# Altium PCB isokey_left.PcbDoc (part 1 of 5)
Units mm, origin at the board's own origin, x right, y up, seen from the top; angles counter-clockwise.
Board outline 154.06 x 134.15 mm, 2 copper layers (Top Layer, Bottom Layer), stack 1.569 mm thick; 140 components, 88 nets, 412 pads, 257 vias.
Unrouted connection lines stored in the file: 18.
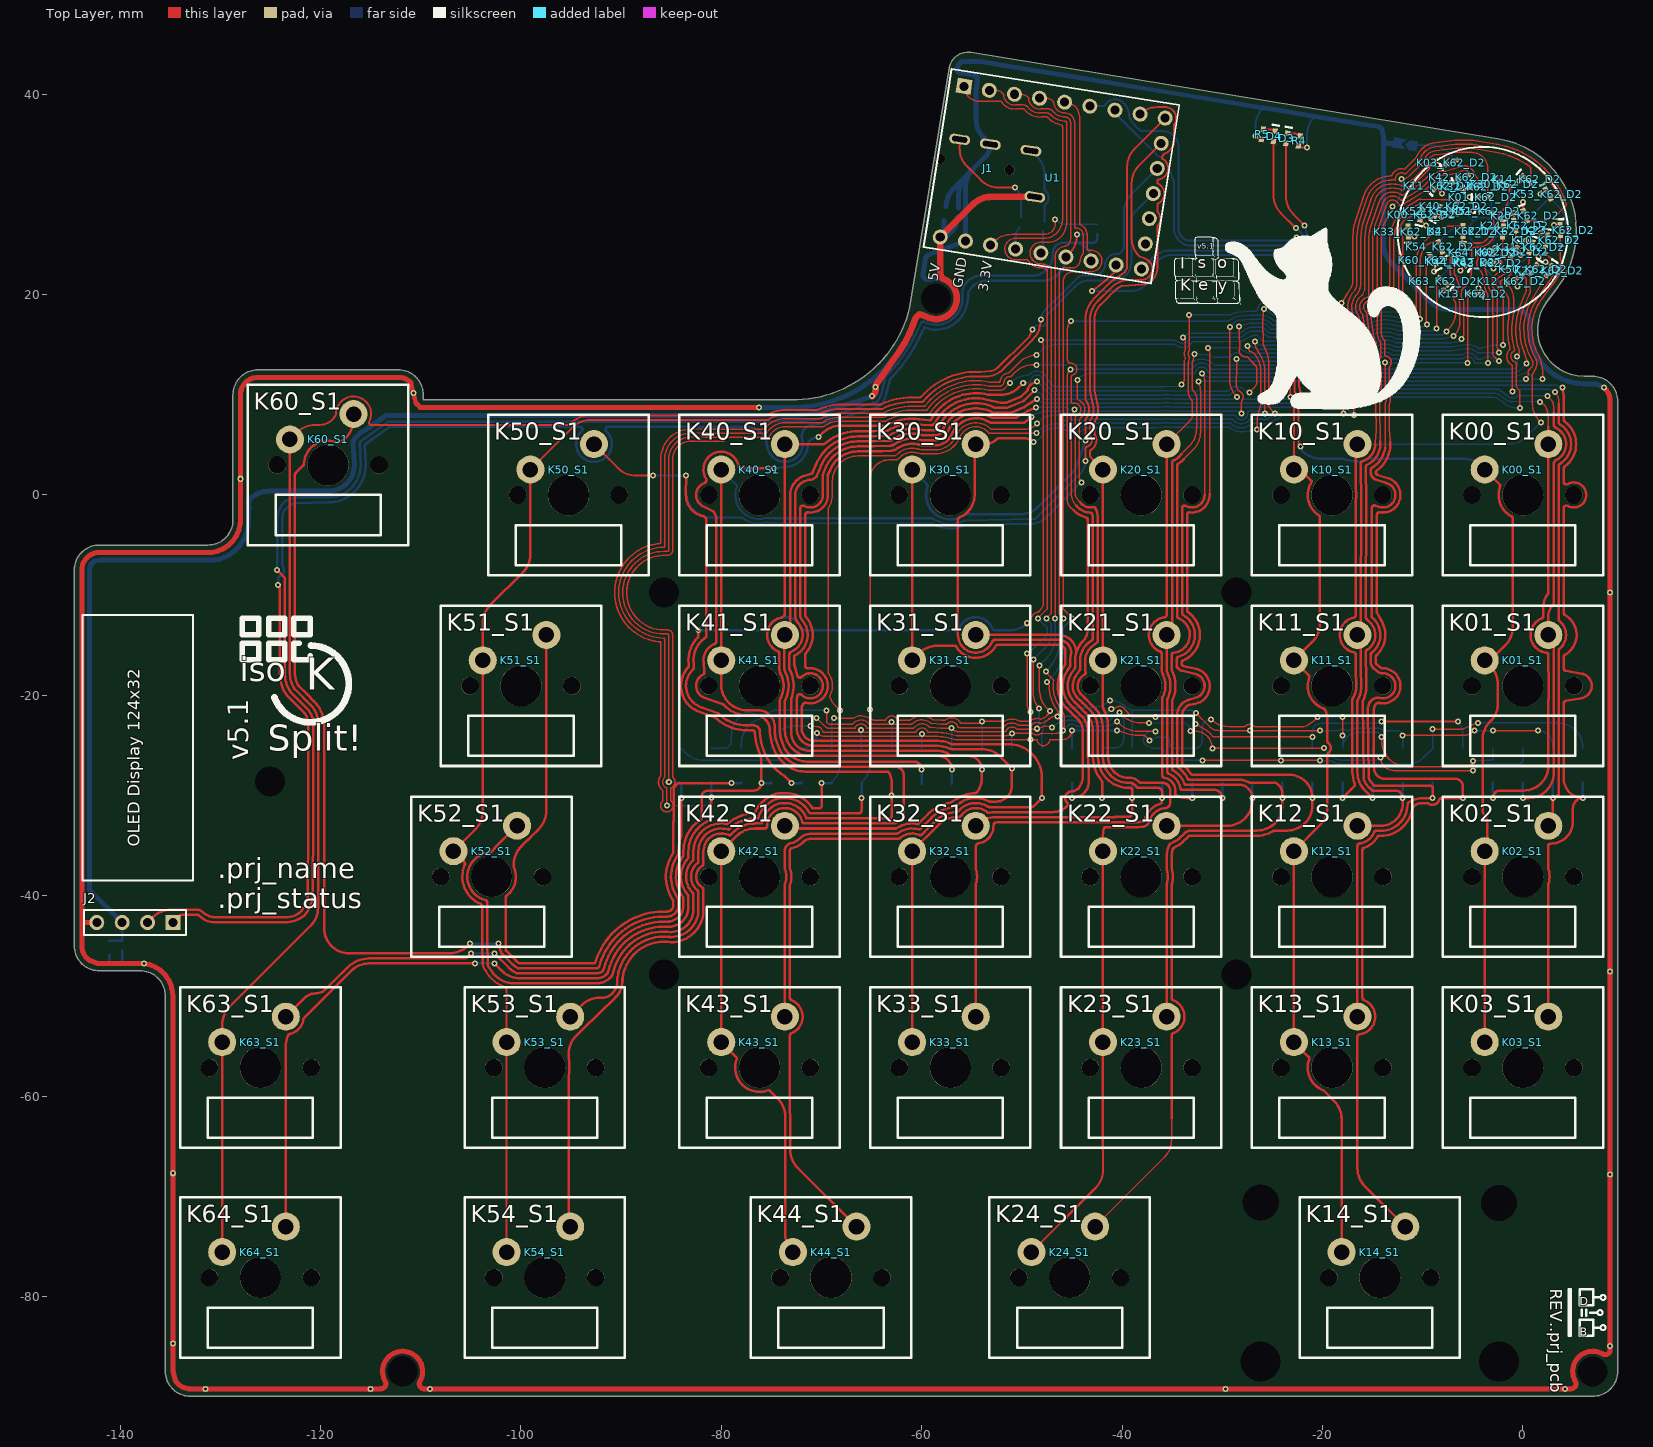
[diagram p0: Top Layer view]
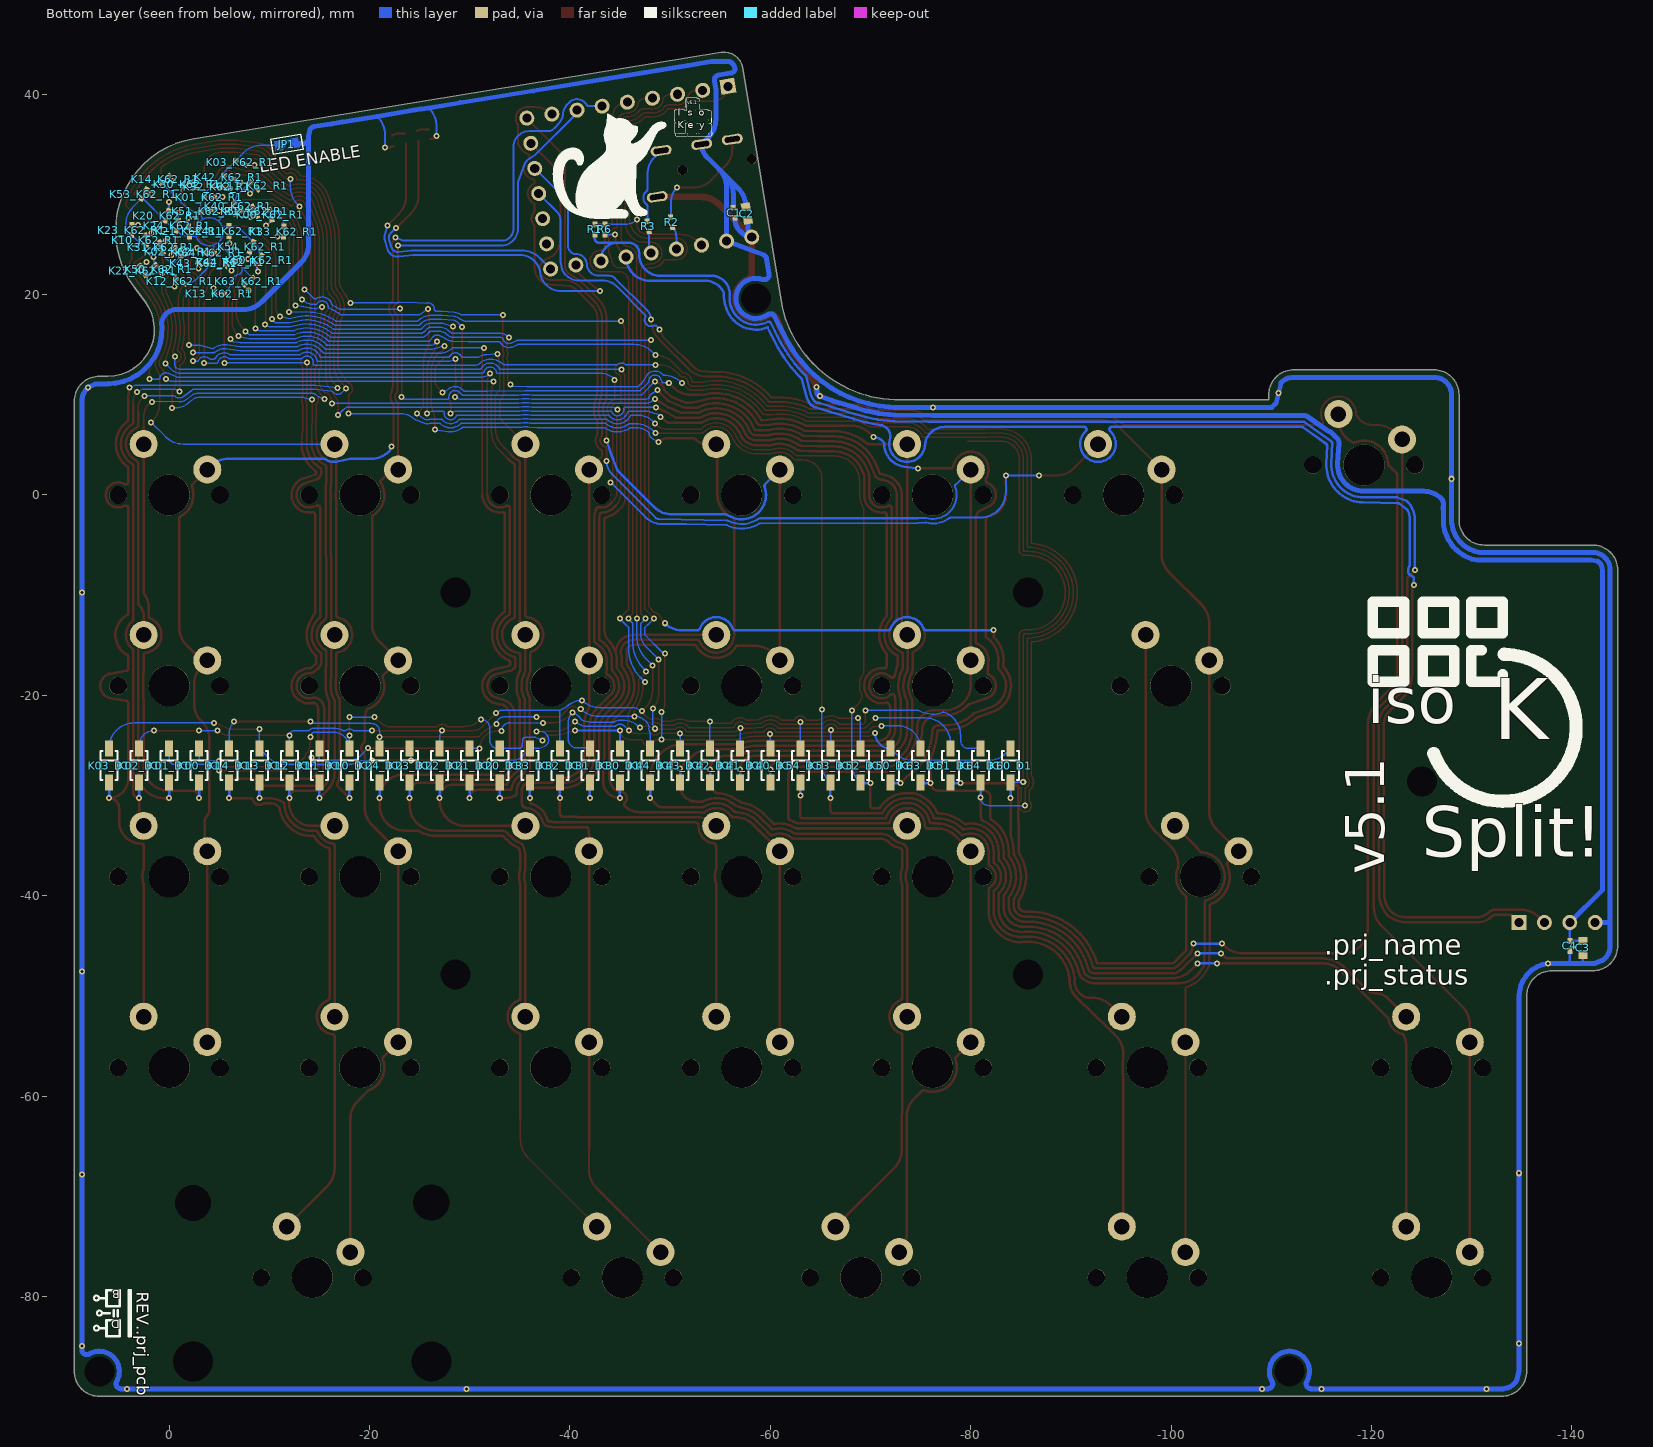
[diagram p1: Bottom Layer view, seen from below]
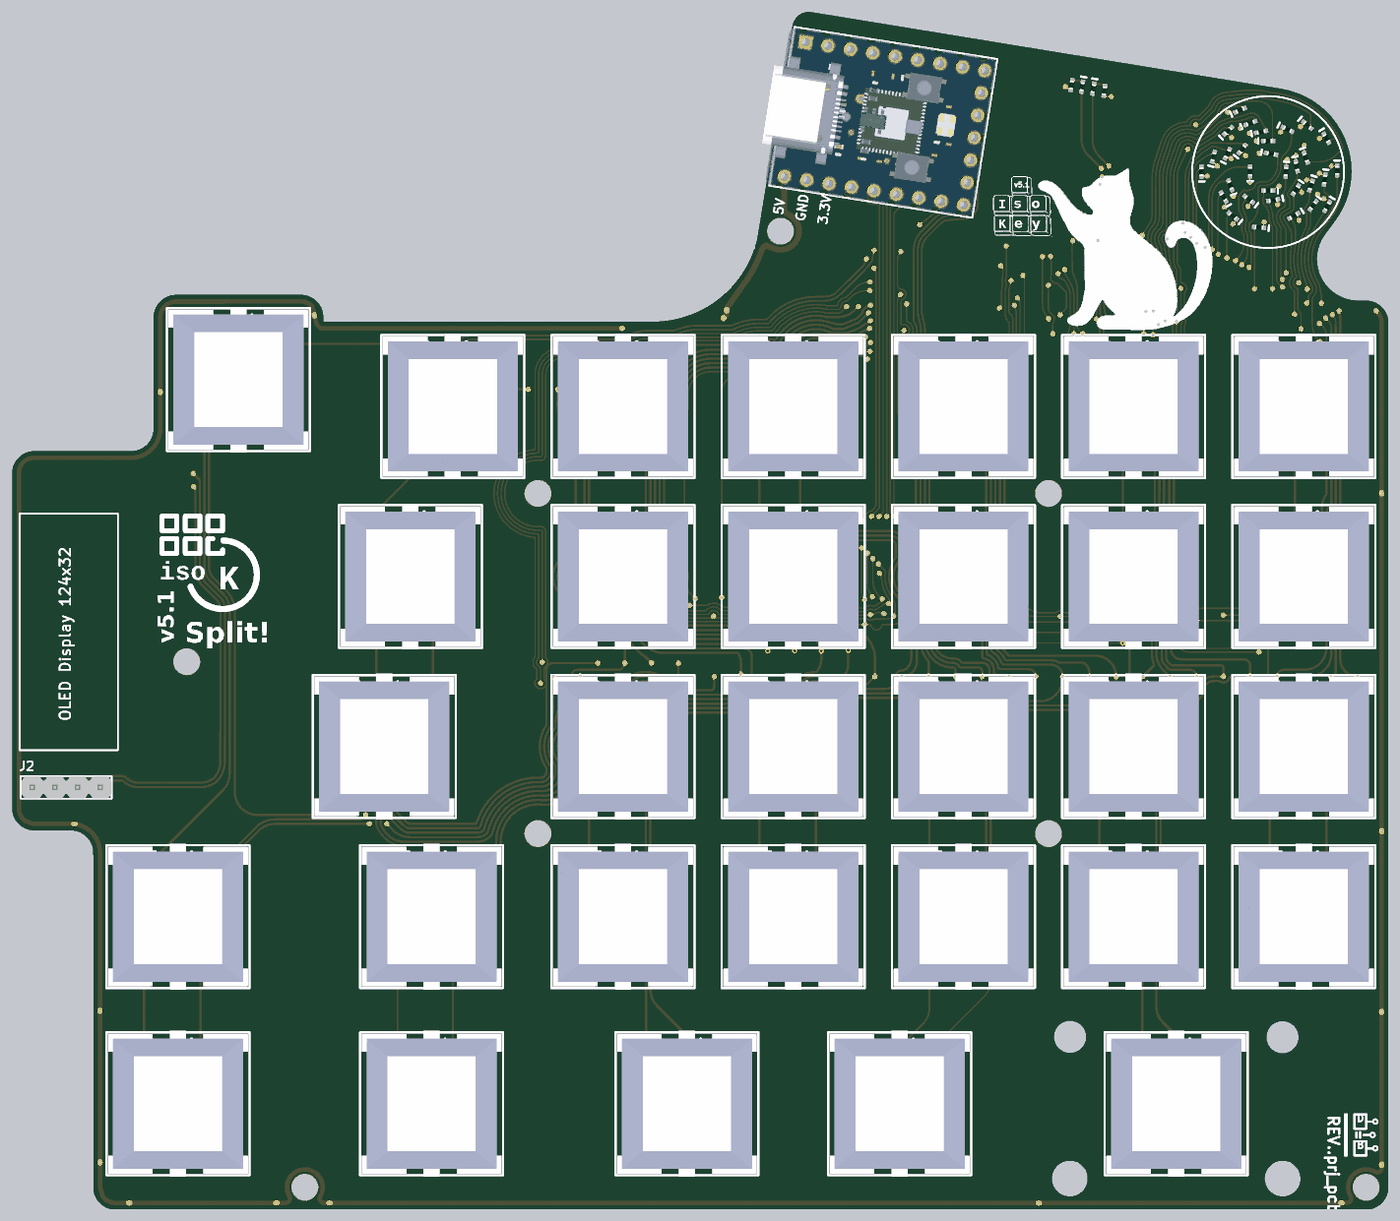
[diagram p6: 3D render of the assembled board from above, using the file's embedded part models]
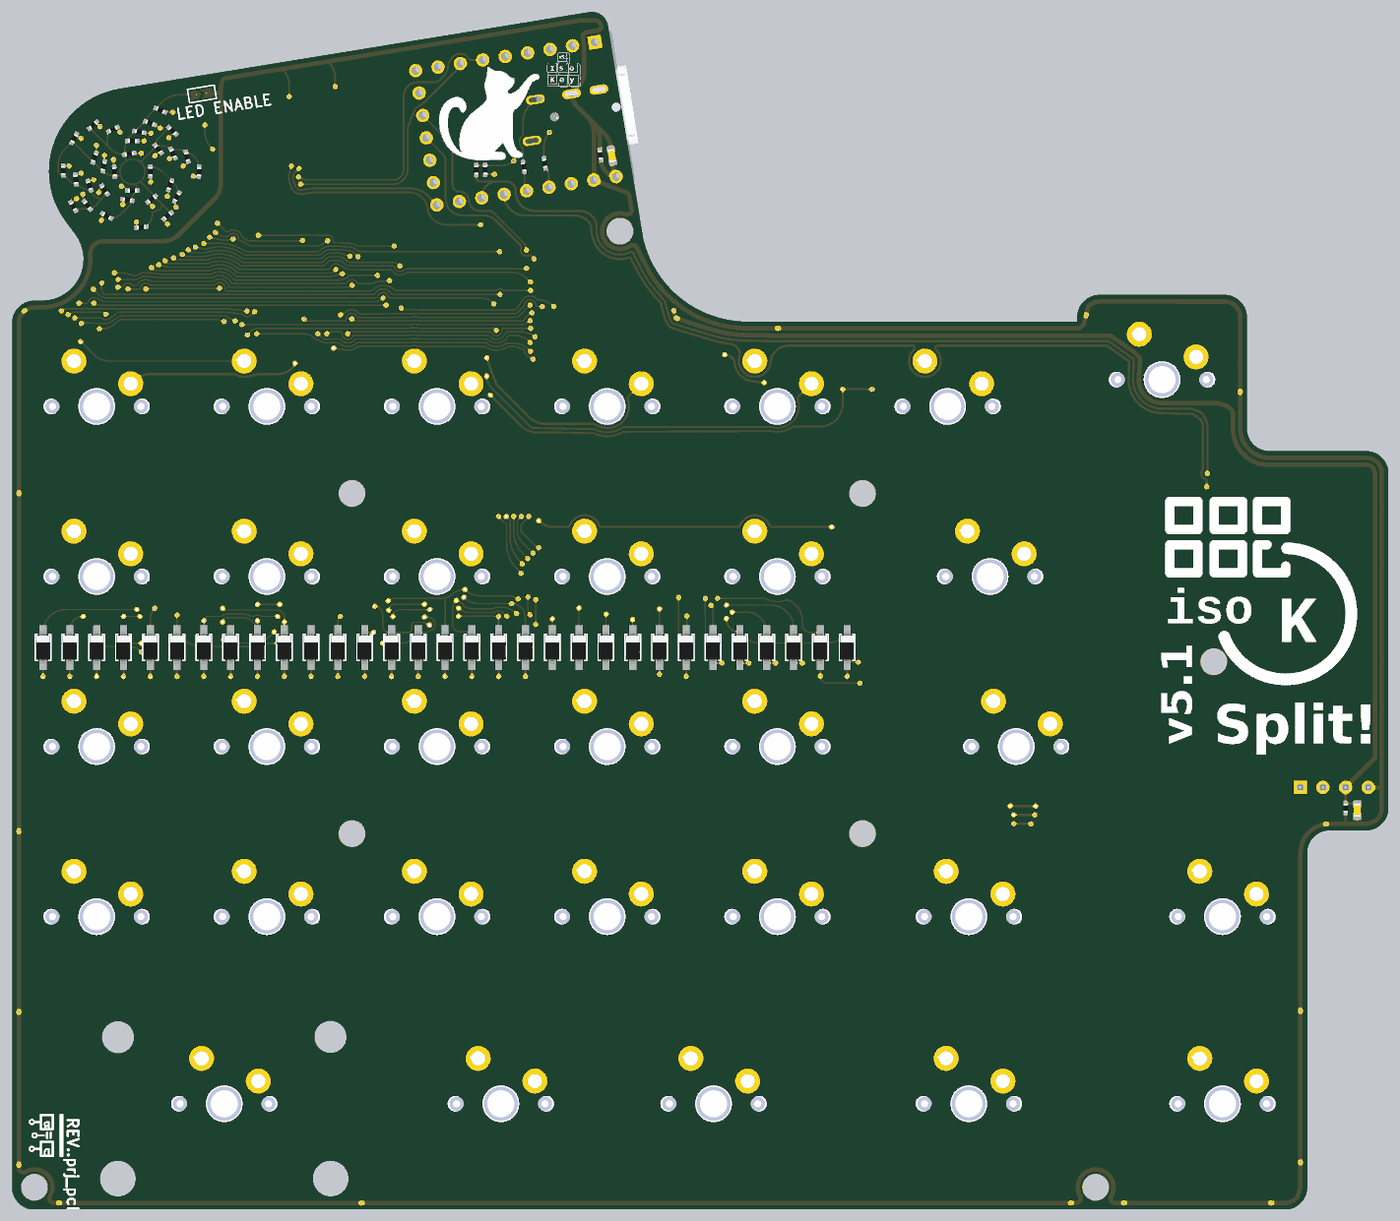
[diagram p7: 3D render of the assembled board from below, using the file's embedded part models]

## Layer stack, top to bottom
Top Solder: solder mask 0.0254, SM-001, Dk 4
Top Layer: signal copper 0.035
Dielectric 1: core 1.4986, Core-043, Dk 4.3
Bottom Layer: signal copper 0.035
Bottom Solder: solder mask 0.0254, SM-001, Dk 4

## Board outline
-138,-47.49 cw(c-138,-49.99) -135.5,-49.99 -135.5,-87.462 ccw(c-133,-87.462) -133,-89.962 6.969,-89.962 ccw(c6.969,-87.462) 9.469,-87.462 9.469,9.35 ccw(c6.969,9.35) 6.969,11.85 6.116,11.85 5.433,11.901 4.764,12.051 4.124,12.298 3.528,12.637 2.988,13.06 2.516,13.557 2.122,14.119 1.816,14.732 1.602,15.384 1.487,16.06 1.473,16.745 1.559,17.425 1.745,18.085 2.026,18.711 2.395,19.289 3.481,20.737 3.964,21.447 4.38,22.199 4.725,22.985 4.996,23.8 5.191,24.636 5.309,25.487 5.349,26.344 5.301,27.284 5.16,28.214 4.926,29.124 4.601,30.007 4.19,30.853 3.696,31.653 3.123,32.399 2.479,33.085 1.769,33.702 1.001,34.244 0.182,34.707 -0.68,35.084 -1.575,35.374 -2.494,35.572 -55.115,44.167 -55.476,44.19 -55.835,44.142 -56.178,44.025 -56.492,43.844 -56.764,43.605 -56.984,43.317 -57.144,42.992 -57.238,42.642 -61.18,18.781 cw(c-72.87,21.493) -72.452,9.5 -109.751,9.5 -109.751,10 ccw(c-112.251,10) -112.251,12.5 -126.245,12.5 -126.245,12.495 ccw(c-126.245,9.995) -128.745,9.995 -128.75,9.995 -128.75,-2.5 cw(c-131.25,-2.5) -131.25,-5 -142.088,-5 ccw(c-142.088,-7.5) -144.588,-7.5 -144.588,-44.99 ccw(c-142.088,-44.99) -142.088,-47.49

## Design rules (kind name [scope] priority, off if disabled: settings)
BoardOutlineClearance [not (InComponent('U1') or InComponent('J1'))] p1: gap=0.45 ignorepadtopadclearanceinfootprint=FALSE
Clearance [All] p1: gap=0.25 ignorepadtopadclearanceinfootprint=FALSE
ComponentClearance [All vs not Component] p1: gap=0.25 collisioncheckmode=3 verticalgap=0.25 showdistances=FALSE
DiffPairsRouting [All] p1: maxlimit=0.25 minlimit=0.25 mostfreqgap=0.25 toplayer_minwidth=0.25 toplayer_maxwidth=0.25 toplayer_prefwidth=0.25 bottomlayer_minwidth=0.25 bottomlayer_maxwidth=0.25 bottomlayer_prefwidth=0.25 maxuncoupledlength=0.25
Height [All] p1: minheight=0 maxheight=25 prefheight=12.5
HoleSize [All] p1: absolutevalues=TRUE maxlimit=10 minlimit=0.2 maxpercent=80.000 minpercent=20.000
HoleToHoleClearance [All] p1: gap=0.25 allowstackedmicrovias=TRUE
MinimumSolderMaskSliver [All] p1: minsoldermaskwidth=0.15
PlaneClearance [All] p1: clearance=0.5
PlaneConnect PlaneConnect_via [isvia] p1: planeconnectstyle=Direct reliefexpansion=0.508 reliefentries=4 reliefconductorwidth=0.254 reliefairgap=0.254
PlaneConnect [All] p2: planeconnectstyle=Relief reliefexpansion=0.6 reliefentries=4 reliefconductorwidth=0.6 reliefairgap=0.3
PolygonConnect PolygonConnect_via [isvia] p1: connectstyle=Direct reliefconductorwidth=0.254 reliefentries=4 polygonreliefangle="90 Angle" airgapwidth=0.254
PolygonConnect [All] p2: connectstyle=Relief reliefconductorwidth=0.6 reliefentries=4 polygonreliefangle="90 Angle" airgapwidth=0.6
RoutingCorners [All] p1: cornerstyle=45-Degree minsetback=2.5 maxsetback=2.5
RoutingVias [All] p1: holewidth=0.3 width=0.6 viastyle="Through Hole" minholewidth=0.2 minwidth=0.3 maxholewidth=0.5 maxwidth=1
SilkToSilkClearance [All] p1: silktosilkclearance=0.15
SilkToSolderMaskClearance [IsPad] p1: minsilkscreentomaskgap=0.15 clearancetoexposedcopper=TRUE
SolderMaskExpansion SolderMaskExpansion_via [isVia] p1: expansion=-10 istentingtop=FALSE
SolderMaskExpansion [All] p2: expansion=0.05 istentingtop=FALSE
SupplyNets "Schematic Supply Nets_3" [InNet('+3.3V')] p1: voltage=0.000
SupplyNets "Schematic Supply Nets_2" [InNet('COM')] p2: voltage=0.000
SupplyNets "Schematic Supply Nets_1" [InNet('+5')] p3: voltage=0.000
SupplyNets "Schematic Supply Nets" [InNet('GND')] p4: voltage=0.000
UnRoutedNet [All] p1: checkbadconnections=TRUE
Width [All] p1: maxlimit=5 minlimit=0.15 preferedwidth=0.25
18 further rules are at their usual default settings.

## Classes and differential pairs
component class K63: K63_D1 K63_K62_D2 K63_K62_R1 K63_S1
component class main: C1 C2 C3 C4 D3 D4 J1 J2 JP1 R1 R2 R3 R4 R5 R6 U1
component class K22: K22_D1 K22_K62_D2 K22_K62_R1 K22_S1
component class K23: K23_D1 K23_K62_D2 K23_K62_R1 K23_S1
component class K64: K64_D1 K64_K62_D2 K64_K62_R1 K64_S1
component class K60: K60_D1 K60_K62_D2 K60_K62_R1 K60_S1
component class K54: K54_D1 K54_K62_D2 K54_K62_R1 K54_S1
component class K53: K53_D1 K53_K62_D2 K53_K62_R1 K53_S1
component class K52: K52_D1 K52_K62_D2 K52_K62_R1 K52_S1
component class K51: K51_D1 K51_K62_D2 K51_K62_R1 K51_S1
component class K50: K50_D1 K50_K62_D2 K50_K62_R1 K50_S1
component class K44: K44_D1 K44_K62_D2 K44_K62_R1 K44_S1
component class K43: K43_D1 K43_K62_D2 K43_K62_R1 K43_S1
component class K42: K42_D1 K42_K62_D2 K42_K62_R1 K42_S1
component class K41: K41_D1 K41_K62_D2 K41_K62_R1 K41_S1
component class K40: K40_D1 K40_K62_D2 K40_K62_R1 K40_S1
component class K33: K33_D1 K33_K62_D2 K33_K62_R1 K33_S1
component class K32: K32_D1 K32_K62_D2 K32_K62_R1 K32_S1
component class K31: K31_D1 K31_K62_D2 K31_K62_R1 K31_S1
component class K30: K30_D1 K30_K62_D2 K30_K62_R1 K30_S1
component class K24: K24_D1 K24_K62_D2 K24_K62_R1 K24_S1
component class K21: K21_D1 K21_K62_D2 K21_K62_R1 K21_S1
component class K20: K20_D1 K20_K62_D2 K20_K62_R1 K20_S1
component class K14: K14_D1 K14_K62_D2 K14_K62_R1 K14_S1
component class K13: K13_D1 K13_K62_D2 K13_K62_R1 K13_S1
component class K12: K12_D1 K12_K62_D2 K12_K62_R1 K12_S1
component class K11: K11_D1 K11_K62_D2 K11_K62_R1 K11_S1
component class K10: K10_D1 K10_K62_D2 K10_K62_R1 K10_S1
component class K03: K03_D1 K03_K62_D2 K03_K62_R1 K03_S1
component class K02: K02_D1 K02_K62_D2 K02_K62_R1 K02_S1
component class K01: K01_D1 K01_K62_D2 K01_K62_R1 K01_S1
channel class key-cell: K00 K01 K02 K03 K10 K11 K12 K13 K14 K20 K21 K22 K23 K24 K30 K31 K32 K33 K40 K41 K42 K43 K44 K50 K51 K52 K53 K54 K60 K63 K64
component class summary: PCB?
component class K00: K00_D1 K00_K62_D2 K00_K62_R1 K00_S1

## Components (designator, comment, footprint, x,y, rotation, side; value= is the part's Value field where it differs from the comment)
C1 "100nF" 0402_[1005] -56.385,28.167 r261 bottom
C2 "10uF" 0603_[1608] -57.664,28.093 r261 bottom
C3 "10uF" 0603_[1608] -141.1,-45.211 r90 bottom
C4 "100nF" 0402_[1005] -139.799,-45 r90 bottom
D3 "K" 0402_[1005]_K1-A2_LED -23.565,35.599 r81 top
D4 "K" 0402_[1005]_K1-A2_LED -24.815,35.812 r81 top
J1 "TRRS" CON_PHONE_TRRS_3.5MM_THD -53.26,32.75 r81 top
J2 "OLED Display 124x32" HEADER_1X4_2.54MM_THD -138.529,-42.671 r180 top
JP1 "LED ENABLE" 0603_[1608]_JUMPER -11.75,35 r171 bottom
K00_D1 "B5819W" SOD-123_K1-A2 -3,-27 r90 bottom (schematic designator D1)
K00_K62_D2 "K" 0402_[1005]_K1-A2_LED -10.112,27.968 r254.97 top (schematic designator K62_D2)
K00_K62_R1 "1k8" 0402_[1005] -10.112,27.968 r254.97 bottom (schematic designator K62_R1)
K00_S1 "MecSwitch" TACTILE_SWITCH_GATERON_PCB 0,0 r0 top (schematic designator S1)
K01_D1 "B5819W" SOD-123_K1-A2 0,-27 r90 bottom (schematic designator D1)
K01_K62_D2 "K" 0402_[1005]_K1-A2_LED -3.999,29.726 r180 top (schematic designator K62_D2)
K01_K62_R1 "1k8" 0402_[1005] -3.999,29.726 r180 bottom (schematic designator K62_R1)
K01_S1 "MecSwitch" TACTILE_SWITCH_GATERON_PCB 0,-19.05 r0 top (schematic designator S1)
K02_D1 "B5819W" SOD-123_K1-A2 3,-27 r90 bottom (schematic designator D1)
K02_K62_D2 "K" 0402_[1005]_K1-A2_LED -0.885,24.268 r56.55 top (schematic designator K62_D2)
K02_K62_R1 "1k8" 0402_[1005] -0.889,24.267 r56.5 bottom (schematic designator K62_R1)
K02_S1 "MecSwitch" TACTILE_SWITCH_GATERON_PCB 0,-38.1 r0 top (schematic designator S1)
K03_D1 "B5819W" SOD-123_K1-A2 6,-27 r90 bottom (schematic designator D1)
K03_K62_D2 "K" 0402_[1005]_K1-A2_LED -7.13,33.184 r203.78 top (schematic designator K62_D2)
K03_K62_R1 "1k8" 0402_[1005] -7.12,33.188 r203.78 bottom (schematic designator K62_R1)
K03_S1 "MecSwitch" TACTILE_SWITCH_GATERON_PCB 0,-57.15 r0 top (schematic designator S1)
K10_D1 "B5819W" SOD-123_K1-A2 -18,-27 r90 bottom (schematic designator D1)
K10_K62_D2 "K" 0402_[1005]_K1-A2_LED 2.338,25.424 r82.8 top (schematic designator K62_D2)
K10_K62_R1 "1k8" 0402_[1005] 2.338,25.424 r82.8 bottom (schematic designator K62_R1)
K10_S1 "MecSwitch" TACTILE_SWITCH_GATERON_PCB -19.05,0 r0 top (schematic designator S1)
K11_D1 "B5819W" SOD-123_K1-A2 -15,-27 r90 bottom (schematic designator D1)
K11_K62_D2 "K" 0402_[1005]_K1-A2_LED -8.478,30.873 r224 top (schematic designator K62_D2)
K11_K62_R1 "1k8" 0402_[1005] -8.478,30.873 r224 bottom (schematic designator K62_R1)
K11_S1 "MecSwitch" TACTILE_SWITCH_GATERON_PCB -19.05,-19.05 r0 top (schematic designator S1)
K12_D1 "B5819W" SOD-123_K1-A2 -12,-27 r90 bottom (schematic designator D1)
K12_K62_D2 "K" 0402_[1005]_K1-A2_LED -1.124,21.346 r30 top (schematic designator K62_D2)
K12_K62_R1 "1k8" 0402_[1005] -1.124,21.346 r30 bottom (schematic designator K62_R1)
K12_S1 "MecSwitch" TACTILE_SWITCH_GATERON_PCB -19.05,-38.1 r0 top (schematic designator S1)
K13_D1 "B5819W" SOD-123_K1-A2 -9,-27 r90 bottom (schematic designator D1)
K13_K62_D2 "K" 0402_[1005]_K1-A2_LED -5.008,20.062 r354.46 top (schematic designator K62_D2)
K13_K62_R1 "1k8" 0402_[1005] -5.008,20.062 r354.46 bottom (schematic designator K62_R1)
K13_S1 "MecSwitch" TACTILE_SWITCH_GATERON_PCB -19.05,-57.15 r0 top (schematic designator S1)
K14_D1 "B5819W" SOD-123_K1-A2 -6,-27 r90 bottom (schematic designator D1)
K14_K62_D2 "K" 0402_[1005]_K1-A2_LED 0.403,31.503 r139.19 top (schematic designator K62_D2)
K14_K62_R1 "1k8" 0402_[1005] 0.403,31.503 r139.19 bottom (schematic designator K62_R1)
K14_S1 "MecSwitch" TACTILE_SWITCH_GATERON_PCB -14.282,-78.106 r0 top (schematic designator S1)
K20_D1 "B5819W" SOD-123_K1-A2 -33,-27 r90 bottom (schematic designator D1)
K20_K62_D2 "K" 0402_[1005]_K1-A2_LED 0.23,27.865 r110 top (schematic designator K62_D2)
K20_K62_R1 "1k8" 0402_[1005] 0.23,27.865 r110 bottom (schematic designator K62_R1)
K20_S1 "MecSwitch" TACTILE_SWITCH_GATERON_PCB -38.1,0 r0 top (schematic designator S1)
K21_D1 "B5819W" SOD-123_K1-A2 -30,-27 r90 bottom (schematic designator D1)
K21_K62_D2 "K" 0402_[1005]_K1-A2_LED -1.998,26.299 r86.52 top (schematic designator K62_D2)
K21_K62_R1 "1k8" 0402_[1005] -1.998,26.299 r86.52 bottom (schematic designator K62_R1)
K21_S1 "MecSwitch" TACTILE_SWITCH_GATERON_PCB -38.1,-19.05 r0 top (schematic designator S1)
K22_D1 "B5819W" SOD-123_K1-A2 -27,-27 r90 bottom (schematic designator D1)
K22_K62_D2 "K" 0402_[1005]_K1-A2_LED 2.618,22.404 r59.43 top (schematic designator K62_D2)
K22_K62_R1 "1k8" 0402_[1005] 2.618,22.404 r59.43 bottom (schematic designator K62_R1)
K22_S1 "MecSwitch" TACTILE_SWITCH_GATERON_PCB -38.1,-38.1 r0 top (schematic designator S1)
K23_D1 "B5819W" SOD-123_K1-A2 -24,-27 r90 bottom (schematic designator D1)
K23_K62_D2 "K" 0402_[1005]_K1-A2_LED 3.731,26.445 r90.42 top (schematic designator K62_D2)
K23_K62_R1 "1k8" 0402_[1005] 3.731,26.445 r90.42 bottom (schematic designator K62_R1)
K23_S1 "MecSwitch" TACTILE_SWITCH_GATERON_PCB -38.1,-57.15 r0 top (schematic designator S1)
K24_D1 "B5819W" SOD-123_K1-A2 -21,-27 r90 bottom (schematic designator D1)
K24_K62_D2 "K" 0402_[1005]_K1-A2_LED -0.798,26.89 r100 top (schematic designator K62_D2)
K24_K62_R1 "1k8" 0402_[1005] -0.798,26.89 r100 bottom (schematic designator K62_R1)
K24_S1 "MecSwitch" TACTILE_SWITCH_GATERON_PCB -45.238,-78.106 r0 top (schematic designator S1)
K30_D1 "B5819W" SOD-123_K1-A2 -45,-27 r90 bottom (schematic designator D1)
K30_K62_D2 "K" 0402_[1005]_K1-A2_LED -1.825,31.035 r154.12 top (schematic designator K62_D2)
K30_K62_R1 "1k8" 0402_[1005] -1.825,31.035 r154.12 bottom (schematic designator K62_R1)
K30_S1 "MecSwitch" TACTILE_SWITCH_GATERON_PCB -57.15,0 r0 top (schematic designator S1)
K31_D1 "B5819W" SOD-123_K1-A2 -42,-27 r90 bottom (schematic designator D1)
K31_K62_D2 "K" 0402_[1005]_K1-A2_LED 0.806,24.742 r71.76 top (schematic designator K62_D2)
K31_K62_R1 "1k8" 0402_[1005] 0.806,24.742 r71.76 bottom (schematic designator K62_R1)
K31_S1 "MecSwitch" TACTILE_SWITCH_GATERON_PCB -57.15,-19.05 r0 top (schematic designator S1)
K32_D1 "B5819W" SOD-123_K1-A2 -39,-27 r90 bottom (schematic designator D1)
K32_K62_D2 "K" 0402_[1005]_K1-A2_LED -4.78,30.757 r190 top (schematic designator K62_D2)
K32_K62_R1 "1k8" 0402_[1005] -4.78,30.757 r190 bottom (schematic designator K62_R1)
K32_S1 "MecSwitch" TACTILE_SWITCH_GATERON_PCB -57.15,-38.1 r0 top (schematic designator S1)
K33_D1 "B5819W" SOD-123_K1-A2 -36,-27 r90 bottom (schematic designator D1)
K33_K62_D2 "K" 0402_[1005]_K1-A2_LED -11.45,26.29 r271.33 top (schematic designator K62_D2)
K33_K62_R1 "1k8" 0402_[1005] -11.45,26.29 r271.33 bottom (schematic designator K62_R1)
K33_S1 "MecSwitch" TACTILE_SWITCH_GATERON_PCB -57.15,-57.15 r0 top (schematic designator S1)
K40_D1 "B5819W" SOD-123_K1-A2 -60,-27 r90 bottom (schematic designator D1)
K40_K62_D2 "K" 0402_[1005]_K1-A2_LED -6.889,28.82 r230.7 top (schematic designator K62_D2)
K40_K62_R1 "1k8" 0402_[1005] -6.889,28.82 r230.7 bottom (schematic designator K62_R1)
K40_S1 "MecSwitch" TACTILE_SWITCH_GATERON_PCB -76.2,0 r0 top (schematic designator S1)
K41_D1 "B5819W" SOD-123_K1-A2 -57,-27 r90 bottom (schematic designator D1)
K41_K62_D2 "K" 0402_[1005]_K1-A2_LED -5.999,26.326 r270 top (schematic designator K62_D2)
K41_K62_R1 "1k8" 0402_[1005] -5.999,26.326 r270 bottom (schematic designator K62_R1)
K41_S1 "MecSwitch" TACTILE_SWITCH_GATERON_PCB -76.2,-19.05 r0 top (schematic designator S1)
K42_D1 "B5819W" SOD-123_K1-A2 -54,-27 r90 bottom (schematic designator D1)
K42_K62_D2 "K" 0402_[1005]_K1-A2_LED -5.965,31.729 r200 top (schematic designator K62_D2)
K42_K62_R1 "1k8" 0402_[1005] -5.965,31.729 r200 bottom (schematic designator K62_R1)
K42_S1 "MecSwitch" TACTILE_SWITCH_GATERON_PCB -76.2,-38.1 r0 top (schematic designator S1)
K43_D1 "B5819W" SOD-123_K1-A2 -51,-27 r90 bottom (schematic designator D1)
K43_K62_D2 "K" 0402_[1005]_K1-A2_LED -3.434,23.125 r10 top (schematic designator K62_D2)
K43_K62_R1 "1k8" 0402_[1005] -3.434,23.125 r10 bottom (schematic designator K62_R1)
K43_S1 "MecSwitch" TACTILE_SWITCH_GATERON_PCB -76.2,-57.15 r0 top (schematic designator S1)
K44_D1 "B5819W" SOD-123_K1-A2 -48,-27 r90 bottom (schematic designator D1)
K44_K62_D2 "K" 0402_[1005]_K1-A2_LED -6.159,23.208 r322.34 top (schematic designator K62_D2)
K44_K62_R1 "1k8" 0402_[1005] -6.155,23.205 r322.34 bottom (schematic designator K62_R1)
K44_S1 "MecSwitch" TACTILE_SWITCH_GATERON_PCB -69.051,-78.106 r0 top (schematic designator S1)
K50_D1 "B5819W" SOD-123_K1-A2 -72,-27 r90 bottom (schematic designator D1)
K50_K62_D2 "K" 0402_[1005]_K1-A2_LED 1.036,22.517 r52.89 top (schematic designator K62_D2)
K50_K62_R1 "1k8" 0402_[1005] 1.036,22.517 r52.89 bottom (schematic designator K62_R1)
K50_S1 "MecSwitch" TACTILE_SWITCH_GATERON_PCB -95.25,0 r0 top (schematic designator S1)
K51_D1 "B5819W" SOD-123_K1-A2 -78,-27 r90 bottom (schematic designator D1)
K51_K62_D2 "K" 0402_[1005]_K1-A2_LED -3.652,28.295 r170 top (schematic designator K62_D2)
K51_K62_R1 "1k8" 0402_[1005] -3.652,28.295 r170 bottom (schematic designator K62_R1)
K51_S1 "MecSwitch" TACTILE_SWITCH_GATERON_PCB -100.006,-19.05 r0 top (schematic designator S1)
K52_D1 "B5819W" SOD-123_K1-A2 -69,-27 r90 bottom (schematic designator D1)
K52_K62_D2 "K" 0402_[1005]_K1-A2_LED -8.553,28.314 r244 top (schematic designator K62_D2)
K52_K62_R1 "1k8" 0402_[1005] -8.549,28.322 r244 bottom (schematic designator K62_R1)
K52_S1 "MecSwitch" TACTILE_SWITCH_GATERON_PCB -102.929,-38.094 r0 top (schematic designator S1)
K53_D1 "B5819W" SOD-123_K1-A2 -66,-27 r90 bottom (schematic designator D1)
K53_K62_D2 "K" 0402_[1005]_K1-A2_LED 2.523,30.03 r119.12 top (schematic designator K62_D2)
K53_K62_R1 "1k8" 0402_[1005] 2.523,30.03 r119.12 bottom (schematic designator K62_R1)
K53_S1 "MecSwitch" TACTILE_SWITCH_GATERON_PCB -97.626,-57.15 r0 top (schematic designator S1)
K54_D1 "B5819W" SOD-123_K1-A2 -63,-27 r90 bottom (schematic designator D1)
K54_K62_D2 "K" 0402_[1005]_K1-A2_LED -8.227,24.786 r290 top (schematic designator K62_D2)
K54_K62_R1 "1k8" 0402_[1005] -8.227,24.786 r290 bottom (schematic designator K62_R1)
K54_S1 "MecSwitch" TACTILE_SWITCH_GATERON_PCB -97.626,-78.106 r0 top (schematic designator S1)
K60_D1 "B5819W" SOD-123_K1-A2 -84,-27 r90 bottom (schematic designator D1)
K60_K62_D2 "K" 0402_[1005]_K1-A2_LED -8.978,23.451 r300 top (schematic designator K62_D2)
K60_K62_R1 "1k8" 0402_[1005] -8.978,23.451 r300 bottom (schematic designator K62_R1)
K60_S1 "MecSwitch" TACTILE_SWITCH_GATERON_PCB -119.25,3 r0 top (schematic designator S1)
K63_D1 "B5819W" SOD-123_K1-A2 -75,-27 r90 bottom (schematic designator D1)
K63_K62_D2 "K" 0402_[1005]_K1-A2_LED -7.942,21.343 r321.08 top (schematic designator K62_D2)
K63_K62_R1 "1k8" 0402_[1005] -7.942,21.343 r321.08 bottom (schematic designator K62_R1)
K63_S1 "MecSwitch" tactile_switch_gateron_pcb -126.012,-57.15 r0 top (schematic designator S1)
K64_D1 "B5819W" SOD-123_K1-A2 -81,-27 r90 bottom (schematic designator D1)
K64_K62_D2 "K" 0402_[1005]_K1-A2_LED -3.999,24.176 r0 top (schematic designator K62_D2)
K64_K62_R1 "1k8" 0402_[1005] -3.999,24.176 r0 bottom (schematic designator K62_R1)
K64_S1 "MecSwitch" TACTILE_SWITCH_GATERON_PCB -126.012,-78.106 r0 top (schematic designator S1)
R1 "NP" 0402_[1005] -42.5,26.5 r90 bottom
R2 "22R" 0402_[1005] -50.151,27.223 r81 bottom
R3 "22R" 0402_[1005] -47.804,26.821 r81 bottom
R4 "1k8" 0402_[1005] -22.315,35.349 r81 top
R5 "1k8" 0402_[1005] -26,36 r81 top
R6 "NP" 0402_[1005] -43.5,26.5 r90 bottom
U1 "RP2040-Zero" RP2040-ZERO -46.926,31.676 r81 top

## Footprints (in the part's own frame and the unit in brackets; to place one, negate y for a bottom-side part, rotate by r counter-clockwise, add the part's x,y. Pads: shape width x height; smd on the part's side, far side on the other; paste and mask are expansions set on the pad)
0402_[1005] [mm] "Chip Capacitor, Body 1.0x0.5mm, IPC High Density"
  rect 0.6x0.5 smd: 1(-0.5,0) 2(0.5,0)
  body extent -0.5,-0.25 0.5,0.25, height 0.42
0402_[1005]_K1-A2_LED [mm] "Chip Capacitor, Body 1.0x0.5mm, IPC High Density"
  rect 0.6x0.5 smd: 1(0.5,0) 2(-0.5,0)
  silkscreen extent 1.1,-0.3 1.1,0.3, body extent -0.5,-0.25 0.5,0.25, height 0.42
0603_[1608] [mm] "Chip Capacitor, Body 1.6x0.8mm, IPC High Density"
  rect 0.8x0.9 smd: 1(-0.7,0) 2(0.7,0)
  body extent -0.75,-0.4 0.75,0.4, height 0.67
0603_[1608]_JUMPER [mil]
  round 1 smd: 1(-23.62,0) 2(21.65,0)
  Top Layer region: 47.24,-19.69 47.24,19.69 -3.94,19.69 15.75,0 15.75,0 -3.94,-19.69
  Top Layer region: -47.24,19.69 -19.68,19.69 0,0 -19.68,-19.68 -47.24,-19.68
CON_PHONE_TRRS_3.5MM_THD [mm] "HC-PJ-320A"
  rrect100% 1x2.1 hole 0.55 slot 1.5 at 90 deg paste-2539.97 mask+0: 1(-2.25,-4.95) 2(2.25,3.35) 3(2.25,0.25) 4(2.25,-3.85)
  round 1 hole 1 unplated paste-2539.97 mask+0: Un1(0,-2.05) Un2(0,4.95)
  body extent -3,-5.55 3,8.42, height 5
HEADER_1X4_2.54MM_THD [mm] "Connector; Header; 4 Position"
  rect 1.5x1.5 hole 0.9: 1(-3.81,0)
  round 1.5 hole 0.9: 2(-1.27,0) 3(1.27,0) 4(3.81,0)
  silkscreen extent -5.08,-1.27 5.08,1.27, body extent -5.08,-1.25 4.98,1.25, height 8.2
RP2040-ZERO [mm] "Module RP2040 with usb C"
  rect 1.5x1.5 hole 0.9: 0(7.62,10.16)
  round 1.5 hole 0.9: 1(7.62,7.62) 2(7.62,5.08) 3(7.62,2.54) 4(7.62,0) 5(7.62,-2.54) 6(7.62,-5.08) 7(7.62,-7.62) 8(7.62,-10.16) 9(5.08,-10.16) 10(2.54,-10.16) 11(0,-10.16) 12(-2.54,-10.16) 13(-5.08,-10.16) 14(-7.62,-10.16) 15(-7.62,-7.62) 16(-7.62,-5.08) 17(-7.62,-2.54) 18(-7.62,0) 19(-7.62,2.54) 20(-7.62,5.08) 21(-7.62,7.62) 22(-7.62,10.16)
  silkscreen extent -8.88,-11.34 9.12,11.66, body extent -8.89,-11.34 9.13,13.24, height 13.9
SOD-123_K1-A2 [mm] "SOD-123; 2 Leads; Body 2.7 x 1.6 mm, (LxW)"
  rect 1.6x0.8 smd: 1(1.7,0) 2(-1.7,0)
  silkscreen extent -1.45,-0.85 1.45,0.85, body extent -1.85,-0.8 1.85,0.8, height 1.27
TACTILE_SWITCH_GATERON_PCB [mm] "16x16mm pcb mount version"
  round 2.8 hole 1.55: 1(-3.81,2.54) 2(2.54,5.08)
  round 1.75 hole 1.75 unplated: Hole(-5.08,0) Hole(5.08,0)
  round 4.1 hole 4.1 unplated: Hole(0,0)
  silkscreen extent -8,-8 8,8, body extent -7.82,-8.16 7.82,8.16, height 14.9
tactile_switch_gateron_pcb [mm] "16x16mm pcb mount version"
  round 2.8 hole 1.55: 1(-3.81,2.54) 2(2.54,5.08)
  round 1.75 hole 1.75 unplated: Hole(-5.08,0) Hole(5.08,0)
  round 4.1 hole 4.1 unplated: Hole(0,0)
  silkscreen extent -8,-8 8,8, body extent -7.82,-8.16 7.82,8.16, height 14.9

## Part data
C1 C2 C3 C4: library part Cap, "Capacitor", ComponentLink1Description="New link"
D3 D4 K00_K62_D2 K01_K62_D2 K02_K62_D2 K03_K62_D2 K10_K62_D2 K11_K62_D2 K12_K62_D2 K13_K62_D2 K14_K62_D2 K20_K62_D2 K21_K62_D2 K22_K62_D2 K23_K62_D2 K24_K62_D2 K30_K62_D2 K31_K62_D2 K32_K62_D2 K33_K62_D2 K40_K62_D2 K41_K62_D2 K42_K62_D2 K43_K62_D2 K44_K62_D2 K50_K62_D2 K51_K62_D2 K52_K62_D2 K53_K62_D2 K54_K62_D2 K60_K62_D2 K63_K62_D2 K64_K62_D2: library part DiodeLedSmall, "Diode Led", MountTechnology=SMT, Publisher="Develer srl", Revision=0.1
J1: library part CON_PHONE_JACK_TSSR, "headphone socket TRRS (Hong Cheng HC-PJ-320A)", MountTechnology=SMT, Publisher="Develer srl", Revision=0.1
J2: library part "Header 4", "Header, 4-Pin", LatestRevisionDate=17-Jul-2002, LatestRevisionNote="Re-released for DXP Platform.", Publisher="Altium Limited"
JP1: library part JumperSMD, "Jumper SMD", MountTechnology=SMT, Publisher="Develer srl", Revision=0.1
K00_D1 K01_D1 K02_D1 K03_D1 K10_D1 K11_D1 K12_D1 K13_D1 K14_D1 K20_D1 K21_D1 K22_D1 K23_D1 K24_D1 K30_D1 K31_D1 K32_D1 K33_D1 K40_D1 K41_D1 K42_D1 K43_D1 K44_D1 K50_D1 K51_D1 K52_D1 K53_D1 K54_D1 K60_D1 K63_D1 K64_D1: library part diode_small, "Diode Schottky  low Vf, If 1A ( LCSC C8598)", CODE LCSC=C8598, MountTechnology=SMT
K00_K62_R1 K01_K62_R1 K02_K62_R1 K03_K62_R1 K10_K62_R1 K11_K62_R1 K12_K62_R1 K13_K62_R1 K14_K62_R1 K20_K62_R1 K21_K62_R1 K22_K62_R1 K23_K62_R1 K24_K62_R1 K30_K62_R1 K31_K62_R1 K32_K62_R1 K33_K62_R1 K40_K62_R1 K41_K62_R1 K42_K62_R1 K43_K62_R1 K44_K62_R1 K50_K62_R1 K51_K62_R1 K52_K62_R1 K53_K62_R1 K54_K62_R1 K60_K62_R1 K63_K62_R1 K64_K62_R1 R1 R2 R3 R4 R5 R6: library part Res, "Resistor", MountTechnology=SMT, Publisher="Develer srl", Revision=0.1
K00_S1 K01_S1 K02_S1 K03_S1 K10_S1 K11_S1 K12_S1 K13_S1 K14_S1 K20_S1 K21_S1 K22_S1 K23_S1 K24_S1 K30_S1 K31_S1 K32_S1 K33_S1 K40_S1 K41_S1 K42_S1 K43_S1 K44_S1 K50_S1 K51_S1 K52_S1 K53_S1 K54_S1 K60_S1 K63_S1 K64_S1: library part SWITCH-RA, "Tactile Switch Right Angle 6x6", Part Number="Tyco FSMRA2JH", MountTechnology=THD, Purchase Code="RS 479-1520"
U1: "module, mini based on RP4020 (RP2350-Zero)", MountTechnology=SMT, Publisher="Develer srl", Revision=0.1

## Free pads (board coordinates)
  round 2.5 hole 3: 1(-125.041,-28.594) 1(-111.819,-87.462) 1(-85.725,-47.85) 1(-85.725,-9.75) 1(-58.572,19.627) 1(-28.575,-47.85) 1(-28.575,-9.75) 1(6.969,-87.462)
  round 0 hole 4 unplated: h6(-26.196,-86.49) h6(-2.373,-86.493)
  round 0 hole 3.6 unplated: h6(-26.163,-70.615) h6(-2.384,-70.656)

## Via types
v1: diameter 0.6, hole 0.3, Top Layer to Bottom Layer, 257 vias

## Nets (pads, with @x,y where several pads share a name; then routed paths per layer and width w, separated by ;. In a path a pad name is that pad's centre, name@x,y a point inside that pad or via, vN(x,y) a via of type N, cw(c..) or ccw(c..) an arc to the next point about the centre after c; other vN are vias at no path point)
+3.3V: R1.2 R6.2 U1.20 | length 12.1
  Top Layer w0.15: U1.20@-53.135,24.944 -52.823,25.256 cw(c-51.027,23.46) -51.027,26 ccw(c-51.027,26.15) -51.018,26 -50.719,26.019 cw(c-50.626,24.547) -50.626,26.022 -48.22,26.022 ccw(c-48.221,26.172) -48.214,26.022 cw(c-48.118,24.149) -48.097,26.024 -47.824,26.022 ccw(c-47.825,27.497) -47.035,26.251 ccw(c-47.883,27.099) -46.684,27.099 v1(-46.684,27.497)
  Bottom Layer w0.15: v1(-46.684,27.497) ccw(c-45.484,28.697) -45.484,27 R6.2@-43.5,27 R1.2@-42.5,27
+5: C1.2 C2.2 C3.2 C4.2 J1.1 J2.3 U1.22 | length 166
  Top Layer w0.65: v1(-64.941,9.867) -64.92,9.883 ccw(c-65.316,10.399) -64.751,10.078 -64.663,10.232 ccw(c-65.229,10.552) -64.579,10.552 -64.579,10.589 ccw(c-65.229,10.589) v1(-64.602,10.761) ; v1@-64.579,10.761 -64.579,10.811 cw(c-63.929,10.811) -64.579,10.816 cw(c-63.929,10.811) -64.46,11.186 -62.565,13.874 cw(c-62.034,13.499) -62.557,13.886 -62.275,14.266 ccw(c-62.938,14.758) -62.236,14.323 -61.72,15.157 ccw(c-62.421,15.592) -61.686,15.216 -61.239,16.089 ccw(c-61.974,16.465) -61.211,16.15 -60.837,17.056 ccw(c-61.6,17.371) -60.814,17.12 -60.695,17.49 cw(c-60.076,17.292) -60.547,17.741 -60.405,17.889 cw(c-59.935,17.44) -60.191,18.038 -59.338,17.698 ccw(c-58.572,19.627) -57.984,17.637 ccw(c-58.572,19.627) -57.759,21.536 cw(c-57.503,22.133) -58.153,22.131 U1.22@-58.153,25.739 -54.882,29.009 cw(c-53.086,27.213) -53.086,29.753 J1.1@-48.723,29.753
  Bottom Layer w0.25: C3.2@-141.1,-44.511 cw(c-141.075,-44.536) -141.075,-44.5 C4.2@-139.799,-44.5 J2.3@-139.799,-42.671
  Bottom Layer w0.5: J2.3@-139.799,-42.671 -143.03,-39.441 cw(c-142.889,-39.3) -143.088,-39.3 -143.088,-7.6 -142.969,-7.078 cw(c-142.482,-7.189) -142.898,-6.913 -142.865,-6.863 -142.715,-6.724 cw(c-142.375,-7.091) -142.653,-6.675 -142.562,-6.614 -141.878,-6.506 cw(c-141.8,-7) -141.8,-6.5 -140.472,-6.5 -130.903,-6.5 -130.561,-6.487 -129.969,-6.378 -129.35,-6.105 ccw(c-130.072,-4.705) -129.198,-6.015 ccw(c-129.655,-5.328) -129.196,-6.014 -128.789,-5.742 ; -128.788,-5.742 ccw(c-129.664,-4.433) -128.548,-5.544 -128.206,-5.202 ccw(c-129.317,-4.086) -128.007,-4.96 -127.736,-4.554 ; -127.735,-4.553 ccw(c-129.045,-3.678) -127.59,-4.28 -127.403,-3.83 ccw(c-128.858,-3.226) -127.313,-3.532 -127.218,-3.053 ccw(c-128.762,-2.745) -127.189,-2.83 -127.173,-2.534 ccw(c-128.496,-2.46) -127.171,-2.46 -127.171,-1.381 cw(c-126.521,-1.383) -127.171,-1.375 -127.171,-0.818 cw(c-126.521,-0.819) -127,-0.38 -126.99,-0.369 cw(c-125.194,-2.165) -125.194,0.375 -119.25,0.375 ccw(c-119.25,3) -116.627,2.904 ccw(c-119.25,3) -116.632,3.197 -116.778,5.132 cw(c-116.13,5.181) -116.592,5.638 -116.591,5.639 -115.989,6.241 ccw(c-116.71,8.08) -115.581,6.459 -113.645,7.808 cw(c-113.273,7.275) -113.273,7.925 -76.21,7.925 ccw(c-76.21,8.425) -76.2,7.925 -72.422,8 ccw(c-72.452,9.5) -72.37,8.002 ; -72.369,8.002 -71.88,8.029 ccw(c-71.921,8.778) -71.877,8.03 ccw(c-71.963,9.527) -71.79,8.037 ccw(c-71.875,8.782) -71.788,8.037 -70.814,8.151 ccw(c-70.901,8.896) -70.812,8.152 ccw(c-70.988,9.641) -70.694,8.17 ; -70.693,8.171 -69.732,8.364 ccw(c-70.027,9.834) -69.614,8.392 ccw(c-69.82,9.114) -69.612,8.393 -68.67,8.664 ccw(c-68.877,9.385) -68.668,8.664 ccw(c-69.084,10.105) -68.649,8.67 -66.277,9.388 ccw(c-66.422,9.867) -66.261,9.394 -66.188,9.418 ccw(c-66.351,9.891) -66.182,9.421 -64.976,9.853 ccw(c-65.144,10.324) v1(-64.941,9.867) ; v1@-64.934,9.845 v1(-64.941,9.867) ; v1(-64.602,10.761) -64.647,10.278 cw(c-65.144,10.324) -64.71,10.077 cw(c-65.573,10.57) -64.712,10.073 cw(c-65.144,10.324) -64.754,10.011 v1(-64.941,9.867) ; C2.2@-57.774,27.401 -57.774,26.653 cw(c-59.066,26.653) U1.22@-58.153,25.739 ccw(c-58.153,27.111) -57.182,26.141 -56.934,26.389 ccw(c-58.069,27.524) -56.463,27.524 C1.2@-56.463,27.673
C0: K00_S1.1 K01_S1.1 K02_S1.1 K03_S1.1 U1.5 | length 133.3
  Top Layer w0.2: v1(-22.585,25.706) -22.284,25.244 cw(c-22.828,24.889) -22.299,24.512 ccw(c-22.135,24.397) -22.335,24.398 -22.335,19.515 ccw(c-22.135,19.516) -22.277,19.374 cw(c-23.05,18.592) -22.276,17.81 ccw(c-22.135,17.669) -22.335,17.67 -22.335,10.942 -22.135,10.014 cw(c-23.21,9.78) -22.364,9.077 ccw(c-22.21,8.949) -22.41,8.95 -22.41,5.128 ccw(c-22.21,5.129) -22.368,5.007 ccw(c-20.822,6.216) v1(-22.21,4.828)
  Top Layer w0.25: K03_S1.1@-3.81,-54.61 K02_S1.1@-3.81,-35.56 ; K01_S1.1@-3.81,-16.51 -3.264,-17.056 cw(c-5.06,-18.852) -2.52,-18.852 -2.52,-21.001 cw(c-4.604,-21.001) -3.131,-22.475 -3.322,-22.666 ccw(c-1.687,-24.302) -4,-24.302 -4,-31.541 ccw(c-3.351,-31.541) -3.81,-32 cw(c-4.399,-32.589) -3.566,-32.589 K02_S1.1@-3.566,-35.56 ; K00_S1.1@-3.81,2.54 -2.343,1.073 cw(c-2.52,0.897) -2.285,0.813 ccw(c0,0) -1.133,-2.144 cw(c-1.25,-2.365) -1,-2.364 -1,-13.193 cw(c-3.54,-13.193) -1.744,-14.989 K01_S1.1@-3.264,-16.51
  Bottom Layer w0.2: U1.5@-43.225,38.804 -41.87,38.804 ccw(c-41.871,39.004) -41.693,38.912 cw(c-40.716,38.407) -40.93,39.486 cw(c-40.716,38.407) -39.917,39.163 -39.74,38.977 cw(c-40.93,37.84) -39.308,38.117 cw(c-39.505,38.084) -39.305,38.073 ccw(c-38.207,38.01) -39.284,37.787 ccw(c-38.207,38.01) -39.092,37.356 -38.815,36.982 ccw(c-36.991,38.33) -38.037,36.317 -35.947,36.317 cw(c-35.947,34.739) -34.369,34.739 -34.369,30.885 ; -34.369,27.999 -34.369,26.59 ccw(c-33.119,26.59) -33.495,25.397 ccw(c-33.436,25.588) -33.462,25.39 ccw(c-33.333,26.418) -33.333,25.382 -23.364,25.382 ccw(c-23.364,25.582) -23.284,25.399 -23.09,25.484 v1(-22.585,25.706) ; -34.369,28.003 -34.369,30.889
  Bottom Layer w0.25: v1(-22.21,4.828) -22.009,4.424 ccw(c-21.785,4.535) -21.963,4.359 -21.961,4.357 ccw(c-20.165,6.154) -20.165,3.614 -18.09,3.614 -16.896,3.347 ccw(c-16.51,5.08) -15.567,3.576 cw(c-15.436,3.363) -15.437,3.613 -5.936,3.613 cw(c-5.936,1.073) -4.14,2.87 K00_S1.1@-3.81,2.54
C1: K10_S1.1 K11_S1.1 K12_S1.1 K13_S1.1 K14_S1.1 U1.6 | length 135.4
  Top Layer w0.2: K10_S1.1@-22.86,2.54 -22.86,9.133 cw(c-22.66,9.132) -22.79,9.284 ccw(c-23.21,9.78) -22.733,10.222 cw(c-22.585,10.356) -22.785,10.355 -22.785,17.882 cw(c-22.585,17.881) -22.695,18.048 ccw(c-23.05,18.592) -22.753,19.17 cw(c-22.66,19.347) -22.86,19.346 -22.86,24.813 cw(c-22.752,24.813) v1(-22.828,24.889)
  Top Layer w0.25: K10_S1.1@-22.86,2.54 cw(c-22.86,1.036) -21.796,2.099 -21.057,1.361 ccw(c-19.05,0) -20.366,-2.037 cw(c-20.5,-2.248) -20.25,-2.248 -20.25,-12.848 cw(c-22.79,-12.848) -20.994,-14.644 K11_S1.1@-22.86,-16.51 -21.494,-17.876 cw(c-23.29,-19.672) -21.384,-17.993 cw(c-21.572,-18.158) -21.336,-18.24 ccw(c-19.05,-19.05) -21.475,-19.05 ; -21.475,-19.05 -21.475,-19.054 ccw(c-19.05,-19.05) -21.255,-20.06 ccw(c-19.05,-19.05) -19.863,-21.335 cw(c-19.947,-21.57) -19.718,-21.47 cw(c-22.05,-22.476) -19.51,-22.476 -19.51,-24.548 ccw(c-19.26,-24.548) -19.423,-24.738 cw(c-19.863,-25.25) -19.422,-25.761 ccw(c-19.26,-25.952) -19.51,-25.952 -19.51,-31.158 cw(c-22.05,-31.158) -20.254,-32.954 K12_S1.1@-22.86,-35.56 K13_S1.1@-22.86,-54.61 -21.393,-56.077 cw(c-21.57,-56.253) -21.335,-56.337 ccw(c-19.05,-57.15) -19.914,-59.416 -18.835,-60.494 cw(c-20.632,-62.29) -18.092,-62.29 K14_S1.1@-18.092,-75.566
  Bottom Layer w0.2: U1.6@-40.716,38.407 ccw(c-40.018,38.407) -40.512,37.913 -36.515,33.917 -35.901,33.522 cw(c-36.493,32.595) -35.459,32.97 -34.831,31.237 cw(c-35.019,31.169) -34.819,31.169 -34.819,26.59 ccw(c-33.119,26.59) -33.119,24.889 v1(-22.828,24.889)
C2: K20_S1.1 K21_S1.1 K22_S1.1 K23_S1.1 K24_S1.1 U1.7 | length 138.1
  Top Layer w0.2: K24_S1.1@-49.048,-75.566 -42.654,-69.172 ccw(c-44.45,-67.376) -41.91,-67.376 -41.91,-64.415 ; K20_S1.1@-41.91,2.54 -43.077,3.707 cw(c-42.935,3.847) -43.104,3.742 ccw(c-43.659,3.403) -43.162,3.822 cw(c-43.009,3.95) -43.209,3.949 -43.209,4.335 cw(c-43.009,4.334) -43.109,4.507 ccw(c-43.659,5.46) -42.729,6.047 cw(c-42.559,6.153) -42.759,6.152 -42.759,7.227 cw(c-42.559,7.226) -42.731,7.327 ccw(c-44.75,8.53) -42.455,9.034 -42.754,10.41 cw(c-42.559,10.452) -42.759,10.452 -42.759,17.513 cw(c-40.669,17.513) -42.146,18.992 -41.442,19.696 -41.265,19.872 -40.736,20.401 cw(c-39.259,18.923) -40.12,20.828 cw(c-40.038,20.645) -40.054,20.845 -37.964,21.014 ccw(c-38.083,22.56) -37.962,21.015 ccw(c-37.999,21.463) -37.96,21.015 ccw(c-38.083,22.56) -37.482,21.131 ccw(c-38.083,22.56) -37.388,21.174 ccw(c-38.083,22.56) -36.942,21.511 ccw(c-38.024,22.593) -36.493,22.593 -36.493,26.741 cw(c-36.293,26.74) -36.447,26.869 ccw(c-37.288,27.577) -36.447,28.287 cw(c-36.293,28.414) -36.493,28.413 -36.493,28.933 cw(c-36.293,28.931) -36.386,29.109 ccw(c-36.891,30.086) -36.386,31.064 cw(c-36.293,31.241) -36.493,31.24 -36.493,31.311 cw(c-36.293,31.31) -36.325,31.508 ccw(c-36.493,32.595) -35.92,33.534 cw(c-35.814,33.704) -35.974,33.824 cw(c-33.953,32.285) -35.816,34.012 cw(c-35.67,33.875) -35.736,34.064 ccw(c-36.096,35.104) -35.193,34.475 -34.819,35.011 -34.819,36.889 cw(c-34.619,36.888) -34.786,36.999 ccw(c-35.699,37.612) -34.819,38.273 ccw(c-35.699,37.612) -35.305,38.639 ccw(c-35.699,37.612) -35.638,38.711 ccw(c-35.699,37.612) -35.755,38.711 cw(c-35.765,38.911) -35.764,38.711 -36.515,38.711 ccw(c-36.515,36.317) U1.7@-38.207,38.01
  Top Layer w0.25: -41.91,-65.261 -41.91,-64.415 K23_S1.1@-41.91,-54.61 K22_S1.1@-41.91,-35.56 -41.91,-33.934 cw(c-39.37,-33.934) -41.838,-33.334 -41.838,-33.333 cw(c-41.595,-33.393) -41.596,-33.143 -38.393,-33.143 ccw(c-38.393,-30.25) -37.853,-33.092 ccw(c-37.948,-32.602) -37.85,-33.092 ccw(c-37.996,-32.356) -37.274,-32.558 ccw(c-37.755,-32.423) -37.273,-32.555 cw(c-35.56,-33.02) -35.68,-31.249 ccw(c-35.698,-31) -35.647,-31.244 -35.645,-31.244 ccw(c-35.766,-30.685) -35.194,-30.685 -35.194,-29.506 ccw(c-35.978,-29.506) -35.978,-28.722 -38.132,-28.722 cw(c-38.132,-28.472) -38.318,-28.639 -38.319,-28.638 ccw(c-39.25,-29.472) -39.25,-28.222 -39.37,-28.222 cw(c-39.37,-26.182) -40.664,-27.759 cw(c-39.37,-26.182) -40.694,-27.734 -40.818,-27.61 cw(c-39.392,-26.182) -41.2,-27.078 cw(c-38.989,-26.092) -41.41,-26.092 -41.41,-22.941 ccw(c-44.45,-22.941) -41.873,-21.329 cw(c-41.66,-21.197) -41.91,-21.199 K21_S1.1@-41.91,-16.51 K20_S1.1@-41.91,2.54
C3: K30_S1.1 K31_S1.1 K32_S1.1 K33_S1.1 U1.8 | length 149.8
  Top Layer w0.2: v1(-43.659,5.46) -43.659,7.504 cw(c-43.459,7.503) -43.616,7.627 ccw(c-44.75,8.53) -43.616,9.434 cw(c-43.459,9.558) -43.659,9.556 -43.659,15.921 -43.659,17.513 cw(c-40.669,17.513) -42.784,19.627 ; -42.783,19.627 -41.373,21.038 cw(c-39.259,18.923) -40.93,21.402 -39.977,22.045 ccw(c-40.591,22.957) -39.73,22.273 ccw(c-40.591,22.957) -39.491,22.957 -39.491,32.767 cw(c-36.951,32.767) -38.747,34.563 U1.8@-35.699,37.612
  Top Layer w0.25: K33_S1.1@-60.96,-54.61 K32_S1.1@-60.96,-35.56 -58.287,-32.887 cw(c-56.491,-34.683) -56.491,-32.143 -56.293,-32.143 ccw(c-56.293,-31.893) -56.085,-32.033 cw(c-54.61,-33.02) -55.964,-31.872 cw(c-54.61,-33.02) -55.758,-31.666 cw(c-54.61,-33.02) -53.664,-31.518 cw(c-54.61,-33.02) -53.481,-31.65 ccw(c-53.323,-31.457) -53.323,-31.707 ccw(c-53.323,-31.457) -53.276,-31.702 cw(c-52.681,-34.683) -53.274,-31.702 cw(c-52.681,-34.683) -52.681,-31.643 -46.914,-31.643 ccw(c-46.914,-29.647) -45.499,-31.056 ccw(c-45.677,-30.88) -45.494,-30.71 cw(c-45,-30.25) -44.955,-29.576 -44.954,-29.577 ccw(c-44.939,-29.327) -44.836,-29.555 -44.463,-29.386 ccw(c-45.752,-28.097) -43.929,-28.097 -43.929,-27.217 ; K30_S1.1@-60.96,2.54 K31_S1.1@-60.96,-16.51 -60.225,-15.775 cw(c-58.429,-17.571) -58.429,-15.031 -56.767,-15.031 cw(c-56.768,-15.281) -56.555,-15.151 ccw(c-54.61,-13.97) -52.598,-15.031 cw(c-52.434,-15.22) -52.434,-14.97 -48.28,-14.97 -46.341,-14.97 cw(c-46.341,-15.736) -45.965,-15.069 cw(c-46.088,-15.286) -45.912,-15.108 -45.692,-15.328 -45.674,-16.033 cw(c-45.924,-16.039) -45.674,-16.039 -45.674,-16.21 cw(c-45.924,-16.209) -45.674,-16.227 ccw(c-41.91,-16.51) -45.683,-16.627 -45.674,-16.931 -45.886,-17.25 ; -45.886,-17.251 ccw(c-43.18,-19.05) -46.347,-18.322 ccw(c-43.18,-19.05) -46.398,-18.597 ccw(c-43.18,-19.05) -46.424,-18.851 ccw(c-43.18,-19.05) -46.309,-19.928 ccw(c-43.18,-19.05) -46.066,-20.545 ccw(c-43.18,-19.05) -45.682,-21.125 ccw(c-43.18,-19.05) -45.603,-21.216 ccw(c-43.18,-19.05) -45.527,-21.298 ccw(c-43.18,-19.05) -45.381,-21.441 -45.206,-21.602 cw(c-45.376,-21.786) -45.201,-21.607 -45.199,-21.609 -44.811,-21.997 -44.351,-22.457 cw(c-45.45,-23.536) -43.91,-23.536 -43.91,-24.859 -43.929,-27.212
  Bottom Layer w0.25: K30_S1.1@-60.96,2.54 -59.492,1.072 cw(c-59.67,0.897) -59.434,0.814 ccw(c-57.15,0) -56.099,-2.186 ccw(c-57.15,0) -56.094,-2.183 cw(c-55.889,-2.611) -56.091,-2.181 cw(c-55.694,-3.017) -56.089,-2.181 cw(c-55.886,-2.61) -56.085,-2.179 cw(c-55.608,-3.198) -56.075,-2.174 -55.616,-1.965 cw(c-55.513,-2.193) -55.513,-1.942 -50.202,-1.942 ccw(c-50.202,0.598) -48.406,-1.199 -44.797,2.41 ccw(c-44.975,2.587) -44.742,2.494 -44.304,3.6 cw(c-43.659,3.403) -44.297,3.624 v1(-43.659,5.46)
C4: K40_S1.1 K41_S1.1 K42_S1.1 K43_S1.1 K44_S1.1 U1.9 | length 195.1
  Top Layer w0.2: v1(-43.659,3.403) -43.659,4.635 cw(c-43.459,4.634) -43.507,4.828 ccw(c-43.659,5.46) -43.162,5.88 cw(c-43.009,6.008) -43.209,6.007 -43.209,7.357 cw(c-43.009,7.356) -43.175,7.467 ccw(c-44.75,8.53) -42.894,8.938 -43.209,10.381 -43.209,17.513 cw(c-40.669,17.513) -42.465,19.309 -41.055,20.719 cw(c-39.259,18.923) -39.259,21.463 ; -39.258,21.463 -38.086,21.46 ; -38.086,21.46 ccw(c-38.083,22.56) -37.999,21.463 ccw(c-38.083,22.56) -36.983,22.518 ccw(c-38.083,22.56) -37.702,23.592 -38.225,23.785 cw(c-38.155,23.973) -38.296,23.83 -38.297,23.832 cw(c-36.501,25.628) -39.041,25.628 -39.041,31.106 cw(c-36.501,31.106) -38.297,32.902 U1.9@-36.096,35.104
  Top Layer w0.25: K40_S1.1@-80.01,2.54 K41_S1.1@-80.01,-16.51 -80.01,-18.935 ccw(c-77.47,-18.935) -77.47,-21.475 -76.41,-21.475 ; -76.2,-21.475 -76.41,-21.475 ; K44_S1.1@-72.861,-75.566 -72.885,-75.542 cw(c-71.089,-73.746) -73.629,-73.746 -73.629,-62.043 ccw(c-76.169,-62.043) -74.373,-60.247 -75.126,-59.494 ccw(c-75.303,-59.67) -75.386,-59.434 cw(c-76.2,-57.15) -78.485,-56.337 ccw(c-78.72,-56.253) -78.543,-56.077 K43_S1.1@-80.01,-54.61 K42_S1.1@-80.01,-35.56 -78.482,-34.032 cw(c-76.686,-35.828) -76.686,-33.288 -75.684,-33.288 ccw(c-75.685,-33.038) -75.435,-33.036 cw(c-73.66,-33.02) -71.936,-32.599 ccw(c-71.693,-32.538) -71.694,-32.788 -67.952,-32.788 -62.704,-32.788 cw(c-60.96,-35.56) -61.975,-32.446 ccw(c-62.053,-32.209) -61.803,-32.212 -61.803,-32.211 -61.803,-27.963 ccw(c-62.66,-27.963) -62.66,-27.106 -71.62,-27.106 cw(c-71.62,-24.566) -73.095,-26.634 -73.225,-26.541 cw(c-71.46,-24.066) -74.34,-25.038 -74.474,-24.642 cw(c-71.12,-23.51) -74.66,-23.51 -74.66,-23.225 ccw(c-76.41,-23.225) -76.41,-21.475
  Bottom Layer w0.2: K40_S1.1@-80.01,2.54 -78.501,1.031 cw(c-78.643,0.89) -78.455,0.823 ccw(c-76.2,0) -75.556,-2.312 -74.779,-2.312 cw(c-74.779,-2.347) -74.754,-2.322 -58.952,-2.322 ; -58.951,-2.322 cw(c-58.953,-2.522) -58.84,-2.357 -58.791,-2.391 ccw(c-57.15,0) -55.893,-2.613 ccw(c-57.15,0) -55.889,-2.611 cw(c-55.694,-3.017) -55.886,-2.61 cw(c-55.608,-3.198) -55.621,-2.548 -48.882,-2.417 ccw(c-48.891,-1.942) -48.555,-2.278 -44.214,2.063 ccw(c-45.554,3.403) v1(-43.659,3.403)
C5: K50_S1.1 K51_S1.1 K52_S1.1 K53_S1.1 K54_S1.1 U1.10 | length 161.8
  Top Layer w0.2: -103.822,-46.137 -103.797,-46.795 ccw(c-102.648,-46.75) -103.602,-47.391 ccw(c-103.207,-47.127) -103.601,-47.393 -103.323,-47.805 ccw(c-102.929,-47.54) -103.322,-47.807 ccw(c-101.018,-46.252) -102.982,-48.219 -102.859,-48.342 ; -102.859,-48.343 ccw(c-100.727,-46.21) -101.595,-49.097 cw(c-101.654,-49.289) -101.455,-49.264 cw(c-103.976,-49.576) -101.436,-49.576 K53_S1.1@-101.436,-54.61 K54_S1.1@-101.436,-75.566 ; K50_S1.1@-99.06,2.54 -94.852,6.748 cw(c-93.056,4.952) -93.056,7.492 -75.42,7.492 ccw(c-75.421,7.692) -75.31,7.526 cw(c-73.66,5.08) -73.608,8.03 ccw(c-73.606,8.23) -73.607,8.03 -70.514,8.03 ccw(c-70.514,8.23) -70.452,8.04 -69.444,8.371 cw(c-68.122,4.368) -69.43,8.375 ; -69.428,8.376 cw(c-68.122,4.368) -68.122,8.583 -64.021,8.583 ccw(c-64.022,8.783) -63.935,8.603 cw(c-60.96,2.54) -62.423,9.134 ; -62.42,9.134 cw(c-60.96,2.54) -61.771,9.245 ; -61.77,9.245 cw(c-60.96,2.54) -60.761,9.291 ccw(c-60.756,9.491) -60.757,9.291 -59.982,9.293 ccw(c-59.984,9.493) -59.83,9.366 cw(c-54.61,5.08) -56.376,11.599 cw(c-55.937,9.983) -56.372,11.6 cw(c-54.61,5.08) -54.446,11.832 -53.643,11.832 ccw(c-53.643,14.372) -51.847,12.576 -49.184,15.238 ccw(c-49.326,15.38) -49.175,15.248 -48.642,15.862 -48.433,16.148 ccw(c-48.957,16.533) -48.319,16.411 v1(-48.109,17.492)
  Top Layer w0.25: -103.822,-46.795 -103.822,-46.137 -103.868,-45.649 cw(c-103.37,-45.603) -103.87,-45.601 -103.87,-41.037 ccw(c-104.12,-41.038) -104.026,-40.806 cw(c-102.929,-38.094) -105.605,-36.913 ccw(c-105.834,-36.813) -105.657,-36.637 K52_S1.1@-106.739,-35.554 -104.56,-33.375 ccw(c-106.356,-31.579) -103.816,-31.579 K51_S1.1@-103.816,-16.51 -103.816,-12.793 cw(c-101.276,-12.793) -103.072,-10.997 -99.804,-7.729 ccw(c-101.6,-5.933) -99.06,-5.933 K50_S1.1@-99.06,2.54
  Bottom Layer w0.2: v1(-48.109,17.492) -47.974,18.022 cw(c-47.344,17.863) -47.807,18.319 cw(c-47.487,18.004) -47.804,18.322 -44.485,21.642 cw(c-43.884,21.041) -43.884,21.89 -42.87,21.89 ccw(c-42.87,23.076) -41.714,22.815 ccw(c-41.909,22.858) -41.71,22.837 -41.685,23.074 cw(c-40.591,22.957) -41.685,23.076 cw(c-40.591,22.957) -40.93,24.004 cw(c-40.591,22.957) -40.479,24.051 ccw(c-40.459,24.251) -40.388,24.064 ccw(c-40.708,24.891) -39.821,24.891 -39.821,28.215 cw(c-37.281,28.215) -39.077,30.011 U1.10@-36.493,32.595
C6: K60_S1.1 K63_S1.1 K64_S1.1 U1.11 | length 187
  Top Layer w0.2: K60_S1.1@-123.06,5.54 -122.344,6.256 cw(c-120.548,4.46) -120.548,7 -120.056,7 ccw(c-120.056,8.715) -118.475,8.05 ccw(c-118.659,8.127) -118.46,8.122 cw(c-116.71,8.08) -118.341,8.715 cw(c-116.71,8.08) -115.149,7.289 ccw(c-114.97,7.2) -114.971,7 -95.319,7 ccw(c-95.319,7.2) -95.178,7.058 -95.17,7.066 ; -95.17,7.067 cw(c-93.056,4.952) -93.056,7.942 -75.553,7.942 ccw(c-75.554,8.142) -75.449,7.971 cw(c-73.66,5.08) -73.604,8.48 ; -73.603,8.48 -70.586,8.48 ccw(c-70.586,8.68) -70.524,8.49 -70.089,8.633 -69.585,8.798 cw(c-68.122,4.368) -69.572,8.803 ; -69.567,8.804 cw(c-68.122,4.368) -68.122,9.033 -64.124,9.033 ccw(c-64.125,9.233) -64.04,9.052 cw(c-60.96,2.54) -62.523,9.572 ; -62.522,9.573 cw(c-60.96,2.54) -62.52,9.573 cw(c-62.329,8.719) -62.518,9.573 cw(c-62.155,7.938) -62.517,9.574 cw(c-60.96,2.54) -61.826,9.692 cw(c-61.72,8.823) -61.824,9.692 cw(c-60.96,2.54) -60.923,9.744 -60.471,9.742 -60.191,9.743 ccw(c-60.193,9.943) -60.043,9.811 cw(c-54.61,5.08) -56.494,12.033 cw(c-55.937,9.983) -56.49,12.034 cw(c-54.61,5.08) -54.442,12.282 ccw(c-54.438,12.482) -54.439,12.282 -54.15,12.282 ccw(c-54.152,12.482) -54.138,12.282 -53.089,12.357 ; -53.088,12.357 ccw(c-53.643,14.372) -52.497,12.624 -51.189,13.932 cw(c-51.048,13.79) -51.176,13.944 -50.827,14.234 ccw(c-50.954,14.388) -50.814,14.245 -50.383,14.676 -49.514,15.546 ccw(c-49.655,15.687) -49.504,15.556 -49.236,15.864 v1(-48.957,16.533)
  Top Layer w0.25: K64_S1.1@-129.822,-74.251 K63_S1.1@-129.822,-54.61 -129.822,-52.875 cw(c-127.282,-52.875) -129.079,-51.079 -120.994,-42.994 ccw(c-122.79,-41.198) -120.25,-41.198 -120.25,-22.756 ccw(c-122.79,-22.756) -120.994,-20.96 -122.579,-19.375 cw(c-120.52,-17.888) -123.06,-17.888 K60_S1.1@-123.06,5.54
  Bottom Layer w0.2: v1(-48.957,16.533) -48.621,16.87 cw(c-48.48,16.727) -48.393,16.908 ccw(c-48.109,17.492) -47.525,17.777 cw(c-47.344,17.863) -47.487,18.004 -44.663,20.828 cw(c-43.275,19.44) -43.275,21.402 -40.93,21.402 ccw(c-40.93,23.291) -39.248,22.432 ccw(c-39.427,22.522) -39.232,22.477 -39.154,22.81 cw(c-38.083,22.56) -39.151,22.823 ; -39.151,22.823 -39.047,23.243 ccw(c-39.241,23.291) -39.041,23.291 -39.041,27.497 cw(c-37.983,27.497) -38.731,28.245 U1.11@-36.891,30.086
COM: JP1.1 K00_K62_R1.1 K01_K62_R1.1 K02_K62_R1.1 K03_K62_R1.1 K10_K62_R1.1 K11_K62_R1.1 K12_K62_R1.1 K13_K62_R1.1 K14_K62_R1.1 K20_K62_R1.1 K21_K62_R1.1 K22_K62_R1.1 K23_K62_R1.1 K24_K62_R1.1 K30_K62_R1.1 K31_K62_R1.1 K32_K62_R1.1 K33_K62_R1.1 K40_K62_R1.1 K41_K62_R1.1 K42_K62_R1.1 K43_K62_R1.1 K44_K62_R1.1 K50_K62_R1.1 K51_K62_R1.1 K52_K62_R1.1 K53_K62_R1.1 K54_K62_R1.1 K60_K62_R1.1 K63_K62_R1.1 K64_K62_R1.1 | length 78.8
  Bottom Layer w0.15: K33_K62_R1.1@-11.462,26.79 cw(c-9.978,26.79) -11.027,27.838 -10.721,28.145 cw(c-9.983,27.406) K00_K62_R1.1@-9.983,28.45 cw(c-9.207,27.675) -9.207,28.772 K52_K62_R1.1@-8.33,28.772 cw(c-7.278,27.72) -7.278,29.207 K40_K62_R1.1@-6.573,29.207 ; JP1.1@-11.157,34.906 -9.231,34.906 cw(c-9.231,32.366) -7.435,34.162 K03_K62_R1.1@-6.662,33.389 -5.724,32.451 cw(c-6.275,31.9) K42_K62_R1.1@-5.496,31.9 cw(c-5.496,31.533) K42_K62_R1.1@-5.236,31.792 ; K60_K62_R1.1@-9.228,23.884 ccw(c-9.873,24.528) -8.961,24.528 -8.961,24.613 cw(c-8.767,24.613) -8.904,24.75 K54_K62_R1.1@-8.398,25.256 -7.416,26.238 cw(c-5.999,24.821) K41_K62_R1.1@-5.999,26.826 -5.774,26.826 cw(c-5.774,26.226) -5.351,26.65 ; K63_K62_R1.1@-8.331,21.657 -7.327,22.661 ; K11_K62_R1.1@-8.118,31.221 -6.903,30.006 cw(c-7.702,29.207) K40_K62_R1.1@-6.573,29.207 ; -7.061,22.073 cw(c-7.002,22.211) -7.112,22.109 cw(c-6.513,22.661) -7.327,22.661 ; -7.06,22.072 -6.264,21.743 ccw(c-4.151,21.743) -5.645,20.249 K13_K62_R1.1@-5.506,20.11 ; K44_K62_R1.1@-6.602,23.386 -7.327,22.661 ; K44_K62_R1.1@-6.551,23.51 -4.935,25.126 ccw(c-5.019,25.209) -4.901,25.209 ; K42_K62_R1.1@-5.236,31.792 K32_K62_R1.1@-4.288,30.844 -3.732,30.288 cw(c-4.294,29.726) K01_K62_R1.1@-3.499,29.726 cw(c-4.319,28.905) -3.159,28.905 K51_K62_R1.1@-3.159,28.208 ; K64_K62_R1.1@-4.499,24.175 -4.499,24.484 cw(c-3.885,24.484) -4.319,24.918 ; K64_K62_R1.1@-4.327,24.003 cw(c-5.292,23.038) K43_K62_R1.1@-3.927,23.038 ccw(c-3.196,23.038) -3.713,22.521 -2.804,21.613 ccw(c-1.557,22.86) K12_K62_R1.1@-1.557,21.096 ; K30_K62_R1.1@-1.375,30.817 cw(c-1.766,30.426) -1.214,30.426 -1.214,29.202 ; K02_K62_R1.1@-1.165,23.85 -1.039,23.724 -0.929,23.613 -0.57,23.255 ; K14_K62_R1.1@0.781,31.176 -1.177,29.217 cw(c-1.214,29.254) -1.214,29.202 ; K22_K62_R1.1@2.364,21.974 ccw(c2.017,21.626) 2.017,22.118 K50_K62_R1.1@0.735,22.118 cw(c0.735,22.523) 0.448,22.236 ccw(c0.343,22.13) 0.432,22.25 0.073,22.516 cw(c0.444,23.018) -0.145,22.809 ccw(c-0.286,22.759) -0.179,22.864 -0.57,23.255 ; K40_K62_R1.1@-6.573,29.207 ccw(c-6.132,29.207) -6.444,28.896 -4.901,27.353 ; -5.351,26.65 cw(c-4,26.281) -4.901,27.353 ; -5.351,26.65 ccw(c-4,26.281) -4.319,24.918 ; -4.901,27.353 cw(c-4,26.281) -3.382,27.537 ; -4.319,24.918 ccw(c-4,26.281) -2.647,25.92 ; -3.382,27.537 cw(c-4,26.281) -2.6,26.281 cw(c-4,26.281) -2.647,25.92 ; -3.382,27.537 ccw(c-3.92,28.075) -3.159,28.075 K51_K62_R1.1@-3.159,28.208 ; K51_K62_R1.1@-3.159,28.208 ccw(c-3.159,30.506) -1.535,28.881 -1.214,29.202 ; -2.647,25.92 ccw(c-2.358,26.209) -2.358,25.8 K21_K62_R1.1@-2.028,25.8 ccw(c-2.028,27.537) -0.8,26.309 K24_K62_R1.1@-0.711,26.397 ccw(c-0.711,26.675) -0.515,26.479 K20_K62_R1.1@0.401,27.395 2.482,29.476 cw(c2.766,29.192) K53_K62_R1.1@2.766,29.594 3.564,28.795 cw(c1.768,26.999) 4.264,27.468 4.295,27.307 cw(c3.975,27.247) 4.3,27.259 4.306,27.095 cw(c1.768,26.999) 4.308,26.999 4.308,26.187 4.3,26.179 cw(c3.735,26.744) K23_K62_R1.1@3.735,25.945 3.03,25.241 cw(c2.275,25.995) K10_K62_R1.1@2.275,24.928 cw(c0.68,26.523) 0.68,24.267 K31_K62_R1.1@0.649,24.267 0.563,24.059 0.396,23.656 0.375,23.635 cw(c0.269,23.741) 0.374,23.634 cw(c-0.57,24.622) -0.57,23.255
Extra: R3.1 U1.18 | length 2.2
  Bottom Layer w0.2: U1.18@-48.118,24.149 ccw(c-48.685,24.716) -47.883,24.716 R3.1@-47.883,26.328